# Altium PCB Mouse_SendV1.2.PcbDoc
Units mil, origin at the board's own origin, x right, y up, seen from the top; angles counter-clockwise.
Board outline 3072.9 x 2952.76 mil, 2 copper layers (Top Layer, Bottom Layer); 86 components, 63 nets, 345 pads, 275 vias.
Unrouted connection lines stored in the file: 269.
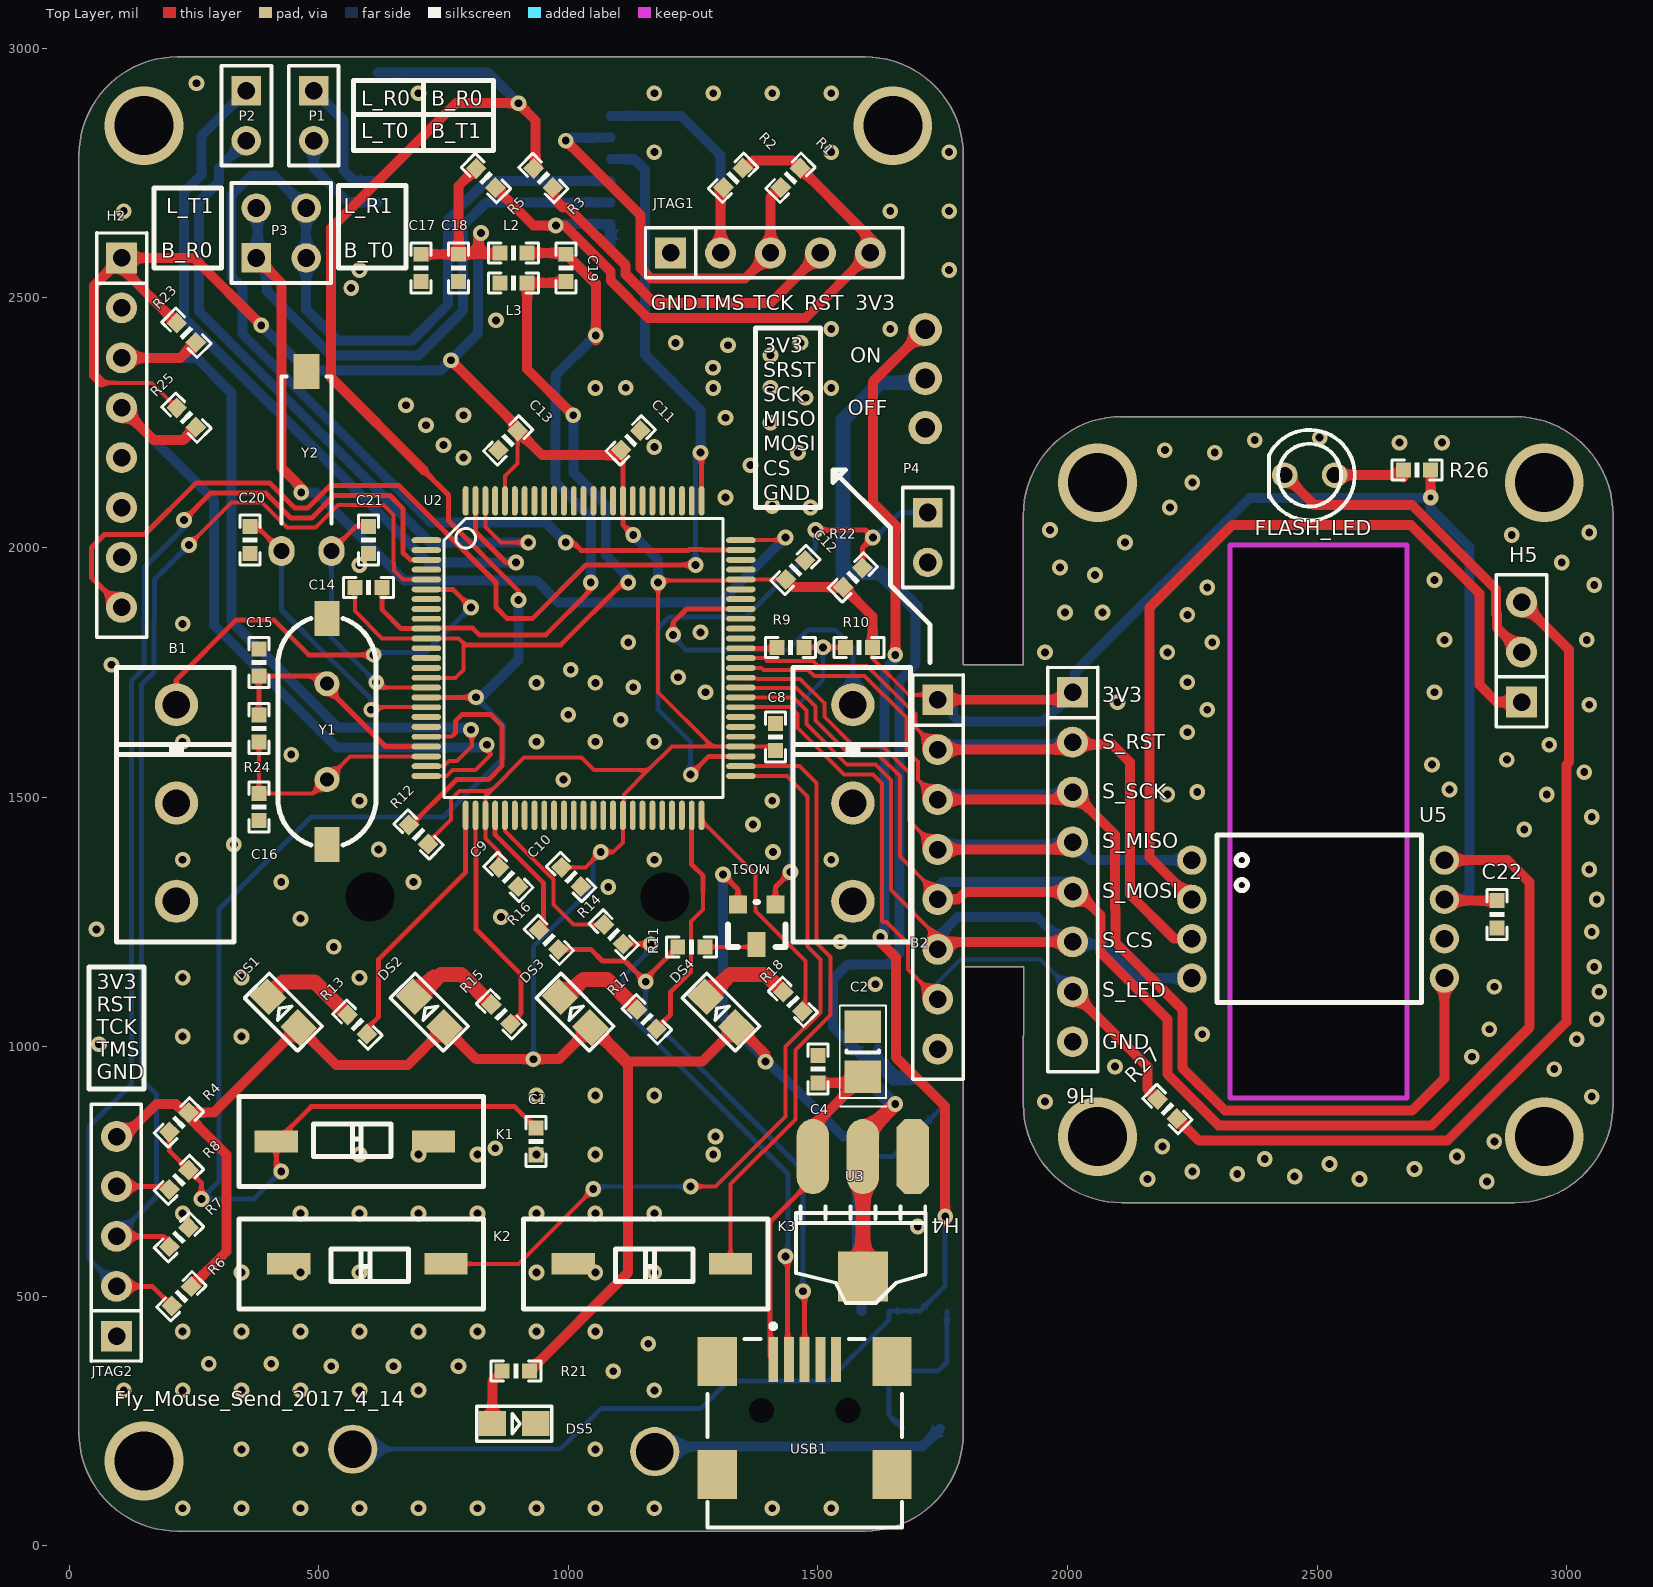
[diagram p0: Top Layer view]
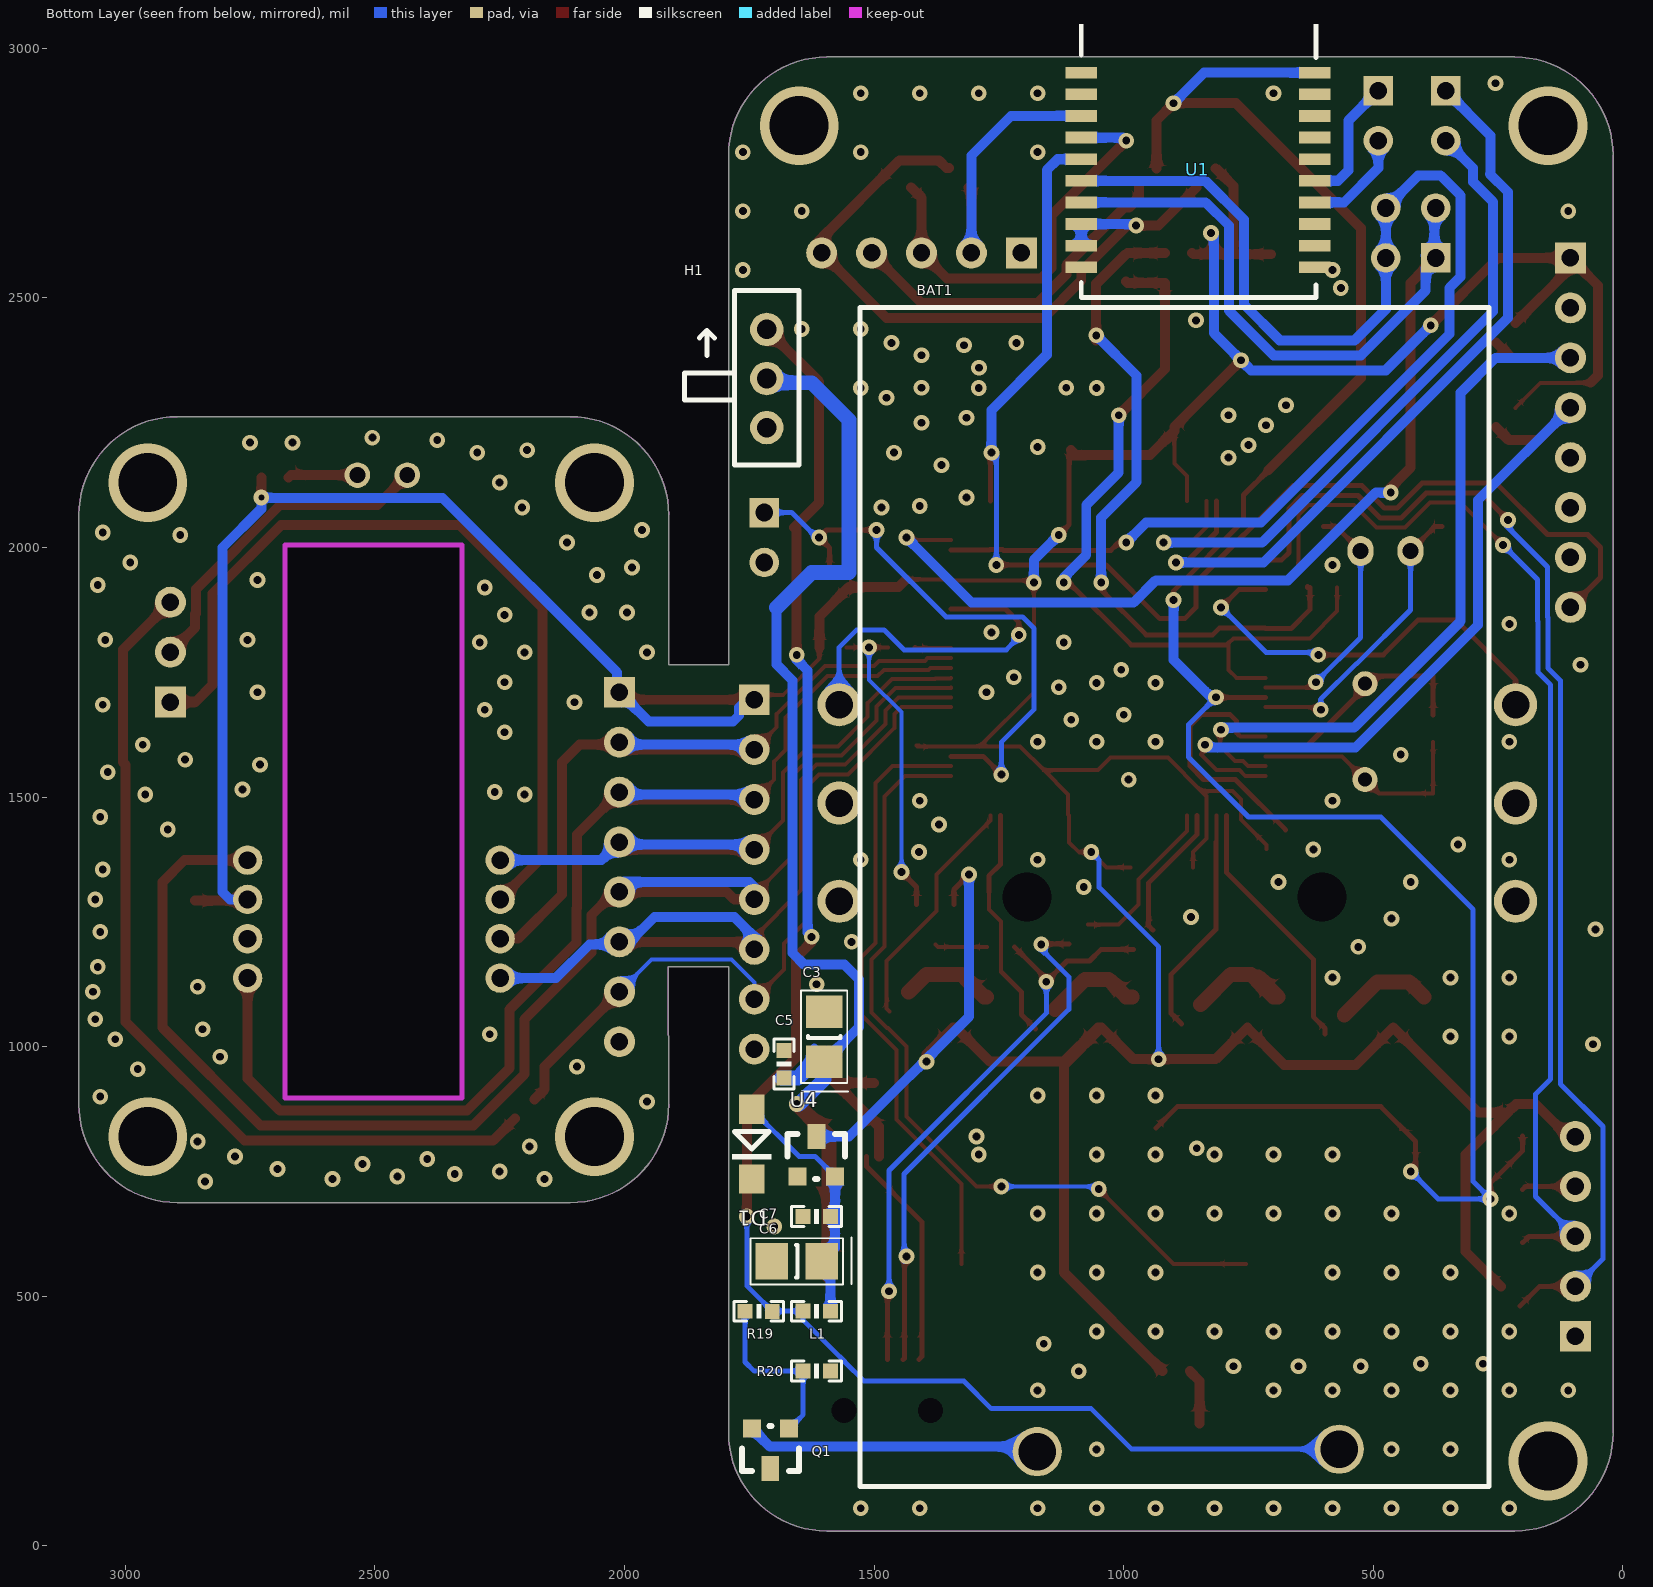
[diagram p1: Bottom Layer view, seen from below]

## Layer stack, top to bottom
Top Solder: solder mask 0.4, Solder Resist, Dk 3.5
Top Layer: signal copper 1.4
Dielectric1: dielectric 12.6, FR-4, Dk 4.8
Bottom Layer: signal copper 1.4
Bottom Solder: solder mask 0.4, Solder Resist, Dk 3.5

## Board outline
216.65,29.8 1594.61,29.8 ccw(c1594.61,226.65) 1791.46,226.65 1791.46,1160 1912.54,1160 1911.6,884.25 ccw(c2108.45,884.25) 2108.45,687.4 2895.85,687.4 ccw(c2895.85,884.25) 3092.7,884.25 3092.7,2065.35 ccw(c2895.85,2065.35) 2895.85,2262.2 2108.45,2262.2 ccw(c2108.45,2065.35) 1911.6,2065.35 1911.6,1765 1791,1765 1791,2065.35 1791.46,2065.35 1791.46,2785.71 ccw(c1594.61,2785.71) 1594.61,2982.56 216.65,2982.56 ccw(c216.65,2785.71) 19.8,2785.71 19.8,226.65 ccw(c216.65,226.65)
cut-out: 2680,2005 2680,897.01 2325.67,897.01 2325.67,2005

## Design rules (kind name [scope] priority, off if disabled: settings)
Clearance Clearance_1 [All] p1: gap=10
Clearance [All] p2: gap=10
MinimumSolderMaskSliver MinimumSolderMaskSliver_USB [HasFootprint('USB/SM0.8-6H5')] p1: minsoldermaskwidth=2
MinimumSolderMaskSliver MinimumSolderMaskSliver_TQFP100 [HasFootprint('TQFP-100') vs InPadClass('All Pads')] p2: minsoldermaskwidth=5
MinimumSolderMaskSliver [All] p3: minsoldermaskwidth=5
PolygonConnect [All] p1: connectstyle=Direct reliefconductorwidth=10 reliefentries=4 polygonreliefangle="90 Angle" airgapwidth=10
RoutingVias [All] p1: holewidth=28 width=50 viastyle="Through Hole" minholewidth=28 minwidth=50 maxholewidth=28 maxwidth=50
SilkToSilkClearance [All] p1: silktosilkclearance=0
SilkToSolderMaskClearance SilkToSolderMaskClearance_1 [IsPad] p1: minsilkscreentomaskgap=0 clearancetoexposedcopper=TRUE
SilkToSolderMaskClearance [IsPad] p2: minsilkscreentomaskgap=10 clearancetoexposedcopper=TRUE
SolderMaskExpansion [All] p1: expansion=4
Width [All] p1: maxlimit=1000 minlimit=8 preferedwidth=20
27 further rules are at their usual default settings.

## Classes and differential pairs
component class Mouse_Send_SCH: B1 B2 BAT1 C1 C2 C3 C4 C5 C6 C7 C8 C9 C10 C11 C12 C13 C14 C15 C16 C17 C18 C19 C20 C21 D1 DS1 DS2 DS3 DS4 DS5 H1 H2 H4 JTAG1 JTAG2 K1 K2 K3 L1 L2 L3 MOS1 P1 P2 P3 P4 Q1 R1 R2 R3 R4 R5 R6 R7 R8 R9 R10 R11 R12 R13 R14 R15 R16 R17 R18 R19 R20 R21 R22 R23 R24 R25 U1 U2 U3 U4 USB1 Y1 Y2
component class Optical_SCH: C22 FLASH_LED H5 H6 R26 R27 U5

## Components (designator, comment, footprint, x,y, rotation, side; value= is the part's Value field where it differs from the comment)
B1 "Button_Mouse_3" BUTTON_MOUSE_3 215,1685 r270 top
B2 "Button_Mouse_3" BUTTON_MOUSE_3 1570,1685 r270 top
BAT1 "BATT" BAT_NUM5_2 268.18,118.9 r0 bottom locked
C1 "104" 0603P 935,810 r90 top
C2 "10uF" TAJ_A 1590,990 r90 top
C3 "10uF" TAJ_A 1600,1019.8 r90 bottom
C4 "104" 0603P 1500,955 r270 top
C5 "104" 0603P 1680,965 r270 bottom
C6 "47uF" TAJ_A 1655,570 r0 bottom
C7 "104" 0603P 1615,660 r180 bottom
C8 "104" 0603P 1415,1620 r90 top
C9 "104" 0603P 880,1340 r315 top
C10 "104" 0603P 1005.6,1340 r315 top
C11 "104" 0603P 1125,2214.49 r45 top
C12 "104" 0603P 1455,1955 r45 top
C13 "104" 0603P 879.49,2214.4 r225 top
C14 "104" 0603P 600,1919.38 r180 top
C15 "22" 0603P 380,1770 r270 top
C16 "22" 0603P 380,1480 r90 top
C17 "104" 0603P 705,2559.94 r90 top
C18 "104" 0603P 780,2559.94 r90 top
C19 "104" 0603P 995,2559.94 r90 top
C20 "22" 0603P 362.31,2015 r90 top
C21 "22" 0603P 600,2015 r90 top
C22 "104" 0603P 2860,1265 r90 top
D1 "1N5817" DIODE_SOP 1745,875 r270 bottom
DS1 "" SMDLED 459.98,1038.41 r135 top
DS2 "" SMDLED 752.15,1038.41 r135 top
DS3 "" SMDLED 1044.33,1038.41 r135 top
DS4 "" SMDLED 1336.5,1038.41 r135 top
DS5 "POWER" SMDLED 847.96,245.06 r0 top
FLASH_LED "LED1" LED_A2 2485,2145 r0 top (schematic designator FLASH)
H1 "" KEY_B 1715,2240 r90 bottom
H2 "Header 8" "HEADER 8" 105,2230 r270 top
H4 "Header 8" "Header 8" 1740,1345 r270 top
H5 "Header 3" head3 2910,1690 r90 top
H6 "Header 8" "Header 8" 2010,1360 r270 top
JTAG1 "SWD" HEAD5 1405,2590 r0 top
JTAG2 "SWD" HEAD5 95,620 r90 top
K1 "KEY3" KEY2 415,810 r0 top
K2 "KEY3" KEY2 755,565 r180 top
K3 "KEY3" KEY2 1324.96,565 r180 top
L1 "221" 0603P 1615,470.13 r180 bottom
L2 "221" 0603P 890,2590 r0 top
L3 "221" 0603P 890,2530 r0 top
MOS1 "SI2301" SOT-23 1415,1285 r180 top
P1 "" HDR1X2 490,2915 r270 top
P2 "" HDR1X2 355,2915 r270 top
P3 "USART1" HDR2X2 375,2580 r0 top
P4 "Header 2" HDR1X2 1720,2070 r270 top
Q1 "MOSFET-N" MOSFET_SOT23 1670,235 r0 bottom
R1 "10K" 0603P 1445,2740.6 r45 top
R2 "10K" 0603P 1330,2740.6 r45 top
R3 "33" 0603P 950,2740 r135 top
R4 "10K" 0603P 220,848.34 r45 top
R5 "0" 0603P 835,2740 r135 top
R6 "10K" 0603P 225,500 r45 top
R7 "10K" 0603P 220,618.33 r45 top
R8 "33" 0603P 220,733.34 r45 top
R9 "1K" 0603P 1445,1800.06 r0 top
R10 "10K" 0603P 1582.5,1799.94 r180 top
R11 "1.5K" 0603P 1246.7,1200 r180 top
R12 "1.5K" 0603P 700,1425 r135 top
R13 "510" 0603P 577.55,1044.09 r135 top
R14 "33" 0603P 1090.91,1224.9 r135 top
R15 "510" 0603P 865.25,1065 r135 top
R16 "33" 0603P 960.91,1214.09 r135 top
R17 "510" 0603P 1157.42,1055 r135 top
R18 "510" 0603P 1450,1090 r135 top
R19 "1K" 0603P 1731.01,470 r0 bottom
R20 "100K" 0603P 1615,350 r180 bottom
R21 "1K" 0603P 895,350 r180 top
R22 "10K" 0603P 1570.1,1940 r225 top
R23 "4.7K" 0603P 235,2430 r135 top
R24 "1M" 0603P 380.13,1637.5 r270 top
R25 "4.7K" 0603P 235,2260 r135 top
R26 "100" 0603P 2700,2155 r0 top
R27 "100" 0603P 2200,875 r135 top
U1 "ZLG9021P0-1" ZLG9021P0-1 860,2826.11 r180 bottom locked
U2 "LPC1765" TQFP-100 716.07,2014.25 r0 top locked
U3 "1117" AMS1117 1690.03,779.94 r180 top
U4 "HT7733_SOT23" SOT-23 1653,740 r180 bottom
U5 "ADNS_5030" ADNS_5030 2249.09,1373.74 r0 top
USB1 "USB-B(Mini)" USB/SM0.8-6H5 1473.39,64.16 r270 top
Y1 "12MHz" XTAL_US 516.5,1535 r90 top
Y2 "32.768KHz" CRY-32 525,1993.32 r90 top

## Footprints (in the part's own frame and the unit in brackets; to place one, negate y for a bottom-side part, rotate by r counter-clockwise, add the part's x,y. Pads: shape width x height; smd on the part's side, far side on the other; paste and mask are expansions set on the pad)
0603P [mil]
  rect 30x30 smd: 1(-27,0) 2(27.5,-0.06)
  silkscreen extent -50,-20 50,20
ADNS_5030 [mm]
  round 1.5 hole 0.9: 1(0,0) 2(0,-2) 3(0,-4) 4(0,-6) 5(12.85,-6) 6(12.85,-4) 7(12.85,-2) 8(12.85,0)
  silkscreen extent 1.27,-7.24 11.68,1.27
AMS1117 [mil]
  oct 65x150 smd: 1(0.03,-0.06)
  oval 65x150 smd: 2(100.03,-0.06) 3(200.03,-0.06)
  rect 100x100 smd: 4(100.03,239.94)
  silkscreen extent -26,100 234,293
BAT_NUM5_2 [mm]
  round 2.5 hole 1.9: 1(7.62,-1.905) 2(22.987,-1.778)
  round 0 hole 2.5: ""(8.5,-30) ""(23.5,-30)
  silkscreen extent 0,-60 32,0
BUTTON_MOUSE_3 [mm]
  round 2.2 hole 1.4: 1(0,0) 2(5,0) 3(10,0)
  silkscreen extent -1.91,-3.05 12.06,2.92
CRY-32 [mil]
  rect 70x52 smd: 0(359.61,49.61)
  oval 60x52 hole 32: 1(-0.4,-0.39) 2(-0.4,99.61)
  silkscreen extent 55,0 350,100
DIODE_SOP [mm]
  rect 1.5x1.3 smd: 1(0,0) 2(3.556,0)
  silkscreen extent 1.14,-1.02 2.56,1.02
HDR1X2 [mm]
  rect 1.5x1.5 hole 0.9: 1(0,0)
  round 1.5 hole 0.9: 2(2.54,0)
  silkscreen extent -1.27,-1.27 3.81,1.27
HDR2X2 [mm]
  rect 1.5x1.5 hole 0.9: 1(0,0)
  round 1.5 hole 0.9: 2(0,2.54) 3(2.54,0) 4(2.54,2.54)
  silkscreen extent -1.27,-1.27 3.81,3.81
head3 [mil]
  rect 62x62 hole 35: 1(0.43,0.42)
  round 62 hole 35: 2(100.43,0.42) 3(200.43,0.42)
  silkscreen extent -50,-50 255,51
HEAD5 [mil]
  rect 62x62 hole 35: 1(-200,0)
  round 62 hole 35: 2(-100,0) 3(0,0) 4(100,0) 5(200,0)
  silkscreen extent -250,-50 265,51
"HEADER 8" [mil]
  rect 62x62 hole 35: 1(-350,0)
  round 62 hole 35: 2(-250,0) 3(-150,0) 4(-50,0) 5(50,0) 6(150,0) 7(250,0) 8(350,0)
  silkscreen extent -400,-50 410,51
"Header 8" [mil]
  rect 62x62 hole 35: 1(-350,0)
  round 62 hole 35: 2(-250,0) 3(-150,0) 4(-50,0) 5(50,0) 6(150,0) 7(250,0) 8(350,0)
  silkscreen extent -400,-50 410,51
KEY2 [mm]
  rect 2.2x1.1 smd: 1(0,0) 2(8,0)
  silkscreen extent -1.91,-2.29 10.54,2.29
KEY_B [mm]
  round 1.7 hole 1: 1(0,0) 2(2.5,0) 3(5,0)
  silkscreen extent -1.91,-1.65 6.98,4.19
LED_A2 [mm] "直径3MM二极管"
  round 1.3 hole 0.8: 1(1.27,0) 2(-1.27,0)
  silkscreen extent -2.06,-2.3 2.3,2.3
MOSFET_SOT23 [mil]
  rect 36x50 smd: 1(38,80)
  rect 36x36 smd: 2(0,0) 3(75,0)
  silkscreen extent -20,-5 95,85
SMDLED [mm]
  rect 1.4x1.27 smd: 1(0.001,-0.002) 2(2.211,-0.002)
  silkscreen extent -0.8,-0.89 3.01,0.89
SOT-23 [mil]
  rect 36x36 smd: 1(0,0) 2(75,0)
  rect 36x50 smd: 3(38,80)
  silkscreen extent -20,-5 95,85
TAJ_A [mm] "Chip Capacitor, 2-Leads, Body 3.2x1.7mm, IPC Medium Density"
  rect 1.65x1.85 smd: 1(-1.275,0) 2(1.275,0)
  silkscreen extent -2.79,-1.21 2.35,1.17, body extent -1.7,-0.9 1.7,0.9, height 1.8
TQFP-100 [mm]
  oval 1.5x0.3 smd: 1(-0.01,0.01) 2(-0.01,-0.49) 3(-0.01,-0.99) 4(-0.01,-1.49) 5(-0.01,-1.99) 6(-0.01,-2.49) 7(-0.01,-2.99) 8(-0.01,-3.49) 9(-0.01,-3.99) 10(-0.01,-4.49) 11(-0.01,-4.99) 12(-0.01,-5.49) 13(-0.01,-5.99) 14(-0.01,-6.49) 15(-0.01,-6.99) 16(-0.01,-7.49) 17(-0.01,-7.99) 18(-0.01,-8.49) 19(-0.01,-8.99) 20(-0.01,-9.49) 21(-0.01,-9.99) 22(-0.01,-10.49) 23(-0.01,-10.99) 24(-0.01,-11.49) 25(-0.01,-11.99) 51(15.99,-11.99) 52(15.99,-11.49) 53(15.99,-10.99) 54(15.99,-10.49) 55(15.99,-9.99) 56(15.99,-9.49) 57(15.99,-8.99) 58(15.99,-8.49) 59(15.99,-7.99) 60(15.99,-7.49) 61(15.99,-6.99) 62(15.99,-6.49) 63(15.99,-5.99) 64(15.99,-5.49) 65(15.99,-4.99) 66(15.99,-4.49) 67(15.99,-3.99) 68(15.99,-3.49) 69(15.99,-2.99) 70(15.99,-2.49) 71(15.99,-1.99) 72(15.99,-1.49) 73(15.99,-0.99) 74(15.99,-0.49) 75(15.99,0.01)
  oval 0.3x1.5 smd: 26(1.99,-13.99) 27(2.49,-13.99) 28(2.99,-13.99) 29(3.49,-13.99) 30(3.99,-13.99) 31(4.49,-13.99) 32(4.99,-13.99) 33(5.49,-13.99) 34(5.99,-13.99) 35(6.49,-13.99) 36(6.99,-13.99) 37(7.49,-13.99) 38(7.99,-13.99) 39(8.49,-13.99) 40(8.99,-13.99) 41(9.49,-13.99) 42(9.99,-13.99) 43(10.49,-13.99) 44(10.99,-13.99) 45(11.49,-13.99) 46(11.99,-13.99) 47(12.49,-13.99) 48(12.99,-13.99) 49(13.49,-13.99) 50(13.99,-13.99) 76(13.99,2.01) 77(13.49,2.01) 78(12.99,2.01) 79(12.49,2.01) 80(11.99,2.01) 81(11.49,2.01) 82(10.99,2.01) 83(10.49,2.01) 84(9.99,2.01) 85(9.49,2.01) 86(8.99,2.01) 87(8.49,2.01) 88(7.99,2.01) 89(7.49,2.01) 90(6.99,2.01) 91(6.49,2.01) 92(5.99,2.01) 93(5.49,2.01) 94(4.99,2.01) 95(4.49,2.01) 96(3.99,2.01) 97(3.49,2.01) 98(2.99,2.01) 99(2.49,2.01) 100(1.99,2.01)
  silkscreen extent 0.89,-13.09 15.09,1.11
USB/SM0.8-6H5 [mm]
  rect 2.3x0.5 smd: 1(-7.85,-1.6) 2(-7.85,-0.8) 3(-7.85,0) 4(-7.85,0.8) 5(-7.85,1.6)
  rect 2.5x2 smd: 6(-7.75,4.45) 7(-1.996,4.45) 8(-7.75,-4.45) 9(-1.996,-4.45)
  round 0.6 hole 1.27 unplated: MH1(-5.25,2.2) MH2(-5.25,-2.2)
  silkscreen extent -9.67,-4.95 0.7,4.95
XTAL_US [mil]
  round 50 hole 28: 1(0,0) 2(192.13,0)
  rect 70x50 smd: ""(-130.32,0) ""(322.44,0)
  silkscreen extent -131,-98 323,98
ZLG9021P0-1 [mm]
  rect 1.6x0.6 smd: 1(-5.715,3.175) 2(-5.715,2.075) 3(-5.715,0.975) 4(-5.715,-0.125) 5(-5.715,-1.225) 6(-5.715,-2.325) 7(-5.715,-3.425) 8(-5.715,-4.525) 9(-5.715,-5.625) 10(-5.715,-6.725) 10(-5.715,-6.725) 11(6.165,-6.725) 11(6.165,-6.725) 12(6.165,-5.625) 13(6.165,-4.525) 14(6.165,-3.425) 15(6.165,-2.325) 16(6.165,-1.225) 17(6.165,-0.125) 18(6.165,0.975) 19(6.165,2.075) 20(6.165,3.175)
  silkscreen extent -5.72,-8.26 6.22,9.5

## Part data
BAT1: library part BAT
C1 C4 C5 C7 C8 C9 C10 C11 C12 C13 C14 C15 C16 C17 C18 C19 C20 C21 C22: library part C
C2 C3 C6: library part CAP
D1: library part D
DS1 DS2 DS3 DS4 DS5 FLASH_LED: library part LED2, "Typical RED, GREEN, YELLOW, AMBER GaAs LED"
H1: library part "Header 3"
L1 L2 L3: library part Inductor
MOS1: library part MOS-P, "IRLML6401/SI2301"
P1 P2: library part "Header 2"
P3: library part "Header 2X2", "Header, 2-Pin, Dual row"
Q1: "N-Channel MOSFET"
R1 R2 R3 R4 R5 R6 R7 R8 R9 R10 R11 R12 R13 R14 R15 R16 R17 R18 R19 R20 R21 R22 R23 R24 R25 R26 R27: library part R
USB1: library part USB5
Y1 Y2: library part CRYSTAL, "Crystal"

## Via types
v1: diameter 31.5, hole 15.75, Top Layer to Bottom Layer, tented both sides, 267 vias
v2: diameter 157.48, hole 118.11, Top Layer to Bottom Layer, 7 vias
v3: diameter 31.5, hole 11.81, Top Layer to Bottom Layer, 1 vias

## Nets (pads, with @x,y where several pads share a name; then routed paths per layer and width w, separated by ;. In a path a pad name is that pad's centre, name@x,y a point inside that pad or via, vN(x,y) a via of type N, cw(c..) or ccw(c..) an arc to the next point about the centre after c; other vN are vias at no path point)
9021_TCK: JTAG1.3 R1.1 U1.4 | length 839.9
  Top Layer w20: v1(995,2815) 1145,2665 1145,2559.72 1165.72,2539 1354,2539 JTAG1.3 1405,2700.6 R1.1
  Bottom Layer w20: v1(995,2815) 1001.19,2821.19 U1.4
9021_TMS: JTAG1.2 R2.1 U1.3 | length 581.9
  Top Layer w20: JTAG1.2 1305,2715.6 R2.1
  Bottom Layer w20: U1.3 1225.5,2864.5 1305,2785 JTAG1.2
9201_RX0: P3.1 P3.2 U1.7 U2.75 | length 2857
  Top Layer w8: U2.75 1429.66,2014.66 v1(1435,2020)
  Top Layer w20: P3.1 425,2530 425,2160 v1@470,2115
  Bottom Layer w20: P3.1@375,2602.49 P3.1@376.25,2603.74 ; P3.1@375,2604.99 P3.1@376.25,2603.74 ; P3.2@375,2672.5 P3.2@377.5,2670 ; P3.1@377.5,2582.5 P3.1@377.5,2602.49 ; P3.2@377.5,2677.5 P3.2@377.5,2670 ; P3.1@395,2560 395,2514.79 524.79,2385 699.85,2385 789.25,2474.4 789.25,2644.81 835.71,2691.27 U1.7 ; P3.1@395,2584.99 P3.1@377.5,2602.49 ; v1(465,2110) 495,2110 670.75,1934.25 935.75,1934.25 980,1890 1305,1890 v1(1435,2020) ; P3.1@376.25,2603.74 P3.1@377.5,2602.49 ; P3.1@376.25,2603.74 P3.1@377.5,2604.99 ; P3.1@377.5,2602.49 P3.1@377.5,2604.99 ; P3.1@377.5,2604.99 P3.2@377.5,2670
9201_TX0: P3.3 P3.4 U1.6 U2.74 | length 2734.9
  Top Layer w10: v1(995,2010) 1010,2010 1025.75,1994.25 1240.77,1994.25 1242.26,1995.75 1267.74,1995.75 1268.78,1994.71 1345.32,1994.71 U2.74
  Bottom Layer w20: P3.3@469.44,2604.99 P3.3@475,2604.99 ; v1(995,2010) 955,2050 725,2050 347.5,2427.5 347.5,2520.16 325.47,2542.19 325.47,2705.47 365,2745 410,2745 P3.4 P3.3@475,2604.99 ; U1.6 836.6,2734.58 759.25,2657.23 759.25,2486.83 687.43,2415 537.22,2415 475,2477.22 P3.3 P3.3@475,2604.99
A_GND: C14.2 C19.1 L3.2 U2.11 U2.15 | length 1570.9
  Top Layer w8: C14.2 572.5,1872.5 627.19,1817.81 780.46,1817.81 790,1808.27 790,1755 774.07,1739.07 U2.15
  Top Layer w10: 790,1808.27 793.27,1805 985,1805 1110,1930 v1(1120,1930)
  Top Layer w20: C19.1 992,2529.94 L3.2 917.5,2357.5 v1(1010,2265)
  Bottom Layer w20: v1(1010,2265) 1010,2150 1075,2085 1075,1985 1120,1940 v1(1120,1930)
A_VCC_3V3: C14.1 C19.2 L2.2 U2.10 | length 1372.8
  Top Layer w10: C14.1 627,1875.49 665,1837.49 U2.10 716.45,1838.27 808.44,1838.27 821.72,1825 955,1825 1045,1915 v1(1045,1930) ; C14.1@632,1919.39 C14.1@632,1922.29
  Top Layer w20: L2.2 992.56,2589.94 C19.2 995.96,2587.44 1055,2528.39 v1(1055,2425) v1@1055,2415
  Bottom Layer w20: v1(1045,1930) 1045,2060 974.25,2130.75 974.25,2344.25 v1(1055,2425)
D+: R11.2 R16.1 USB1.3 | length 1187.2
  Top Layer w10: R16.1 1045,1195 1068.4,1171.6 1113.4,1171.6 v1(1155,1130) 1155,1135.86 R11.2 ; v1(1470,510) 1473.39,506.61 USB1.3
  Bottom Layer w10: v1(1155,1130) 1155,1067.08 1470,752.08 v1(1470,510)
FLASH_LED: H4.7 H6.7 R27.2 U2.58 | length 1494.7
  Top Layer w8: U2.58 1444.99,1680.01 1458.69,1666.31 1458.69,1638.9 1552.13,1545.46 1593.74,1545.46 1594.19,1545 1610,1545 1628,1527 1628,1252 1630.25,1249.75 1637.32,1249.75 1680,1207.07 1680,1155 H4.7 H4.7@1740,1110
  Top Layer w20: H6.7 2160.05,959.95 2160.05,915.05 R27.2
  Bottom Layer w8: H4.7 1740,1128.7 1785.55,1174.25 1945.75,1174.25 H6.7
GND: B1.2 B2.2 C1.1 C2.2 C3.2 C4.1 C5.1 C6.2 C7.1 C8.2 C9.2 C10.2 C11.2 C12.2 C13.2 C15.1 C16.1 C17.1 C18.1 C20.1 C21.1 C22.1 D1.2 DS5.2 H2.2 H2.7 H4.8 H6.8 JTAG1.1 JTAG2.1 K1.2 K2.2 K3.2 L3.1 P4.2 Q1.1 R7.2 R20.2 U1.10 U1.11 U2.31 U2.41 U2.55 U2.72 U2.83 U2.97 U3.1 U4.1 U5.6 USB1.5 USB1.6 USB1.7 USB1.8 USB1.9
  other v1: 227.44,75.35 345.55,75.35 463.66,75.35 581.77,75.35 699.88,75.35 817.99,75.35 936.1,75.35 1054.21,75.35 1172.32,75.35 1408.54,75.35 1526.65,75.35 345.55,193.46 463.66,193.46 1054.21,193.46 109.33,311.57 227.44,311.57 345.55,311.57 463.66,311.57 581.77,311.57 699.88,311.57 1172.32,311.57 1090,350 525,360 650,360 780,360 280,365 405,365 1160,405 227.44,429.68 345.55,429.68 463.66,429.68 581.77,429.68 699.88,429.68 817.99,429.68 936.1,429.68 1054.21,429.68 345.55,547.8 463.66,547.8 581.77,547.8 936.1,547.8 1054.21,547.8 1172.32,547.8 1700,640 227.44,665.91 463.66,665.91 581.77,665.91 699.88,665.91 817.99,665.91 936.1,665.91 1054.21,665.91 1172.32,665.91 2840,730 2160,735 2585,735 2455,740 2340,745 2250,750 2695,755 2525,765 2395,775 2780,780 581.77,784.02 699.88,784.02 817.99,784.02 936.1,784.02 1054.21,784.02 1290.43,784.02 853.5,796.5 2190,800 2855,810 1295,820 1955,890 3050,900 936.1,902.13 1054.21,902.13 1172.32,902.13 2975,955 2095,960 2810,980 60,1005 3020,1015 227.44,1020.24 345.55,1020.24 2270,1025 2845,1035 3060,1055 3065,1110 2855,1120 1615,1125 227.44,1138.35 345.55,1138.35 581.77,1138.35 3055,1160 530,1200 1545,1210 3050,1230 55,1235 463.66,1256.46 865,1260 3060,1295 1080,1320 425,1330 690,1330 3045,1355 227.44,1374.57 1172.32,1374.57 1526.65,1374.57 1410,1390 620,1395 330,1405 2915,1435 1370,1445 3050,1460 581.77,1492.68 1408.54,1492.68 2200,1505 2960,1505 2260,1510 2765,1515 990,1535 3035,1550 2730,1565 2880,1575 445,1585 2965,1605 227.44,1610.79 936.1,1610.79 1054.21,1610.79 1172.32,1610.79 2240,1630 1105,1655 1000,1665 2280,1675 3045,1685 2100,1690 1275,1710 2735,1710 1130,1720 936.1,1728.9 1054.21,1728.9 2240,1730 1220,1740 1005,1755 85,1765 1955,1790 2200,1790 1120,1810 2290,1810 2755,1815 3040,1815 1265,1830 227.44,1847.01 2240,1865 1995,1870 2070,1870 2280,1920 3055,1925 2735,1935 2055,1945 1985,1960 581.77,1965.12 2990,1970 2115,2010 2890,2025 3045,2030 1965,2035 1485,2080 2205,2080 1408.54,2083.23 1315,2100 2250,2130 1365,2165 790,2180 1460,2190 2295,2190 2195,2195 1172.32,2201.34 750,2205 2665,2210 2750,2210 2375,2215 2505,2220 715,2245 1405,2250 1315,2260 790,2265 675,2285 1475,2300 1054.21,2319.45 1290.43,2319.45 1526.65,2319.45 1115,2320 1405,2320 1290,2360 1405,2385 1320,2405 1215,2410 1465,2410 1526.65,2437.56 1644.76,2437.56 855,2455 565,2520 581.77,2555.67 1762.87,2555.67 109.33,2673.78 1644.76,2673.78 1762.87,2673.78 1172.32,2791.89 1526.65,2791.89 1762.87,2791.89 699.88,2910 1172.32,2910 1290.43,2910 1408.54,2910 1526.65,2910 255,2930
  other v2: 150,170 2060,820 2955,820 2060,2130 2955,2130 150,2845 1650,2845
ISP: P4.1 R22.1 U2.53 | length 1195
  Top Layer w10: v1(1245,1545) 1281.59,1581.59 U2.53 ; v1(1495,2035) 1595,2035 v1(1610,2020) 1589.19,1999.19 R22.1 ; P4.1@1700.1,2070 P4.1
  Bottom Layer w10: v1(1245,1545) 1245,1610 1179.25,1675.75 1179.25,1837.74 1202.26,1860.75 1355.75,1860.75 1495,2000 v1(1495,2035) ; v1(1610,2020) 1615,2020 1665,2070 P4.1
KEY0: B1.1 U2.6 | length 865.4
  Top Layer w10: B1.1@215,1681.99 B1.1 215,1735 335,1855 410,1855 480,1785 v1(610,1785) ; U2.6 768.77,1916.23 v1(805,1880)
  Bottom Layer w10: v1(610,1785) 615,1790 715,1790 v1(805,1880)
KEY1: B2.1 U2.68 | length 693.6
  Top Layer w10: v1(1210,1825) 1210,1850 1236.86,1876.86 U2.68 U2.68@1345.9,1877.18
  Bottom Layer w10: v1(1210,1825) 1210,1820 1235,1795 1440,1795 1480,1835 1535,1835 1570,1800 B2.1
KEY2: K3.1 U2.52 | length 1222.9
  Top Layer w8: K3.1 1324.96,724.5 1455,854.54 1455,993.18 1525,1063.18 1525,1180 1496.91,1208.09 1496.91,1528.09 1463.1,1561.9 U2.52
KEY3: K2.1 U2.51 | length 1634.5
  Top Layer w8: K2.1 900,565 v1(1050,715) ; v1(1245,720) 1295,720 1435,860 1435,1000.46 1472.24,1037.69 1474.06,1037.69 1505,1068.63 1505,1174.54 1478.91,1200.64 1478.91,1501.09 1437.78,1542.22 U2.51
  Bottom Layer w8: v1(1050,715) 1055,720 v1(1245,720)
LED0: R13.1 U2.26 | length 520.4
  Top Layer w10: R13.1 596.64,1036.64 620,1060 620,1175 794.41,1349.41 U2.26
LED1: R15.1 U2.27 | length 463.8
  Top Layer w8: U2.27 814.1,1410.91 815,1410
  Top Layer w10: 815,1410 815,1235 905,1145 905,1066.57 R15.1
LED2: R17.1 U2.49 | length 475.8
  Top Layer w8: 1245,1150 1246.2,1151.2 1246.2,1251.2 1270,1275 1270,1310
  Top Layer w10: R17.1 1205,1064.39 1205,1110 1245,1150 ; U2.49 1247.16,1365 1270,1342.16 1270,1310
LED3: R18.1 U2.50 | length 481.2
  Top Layer w8: U2.50@1266.85,1463.48 1266.85,1453.15 1375,1345 1375,1272.03 1475,1172.03 1475,1076.82 R18.1
LPC_RX0: P2.1 U2.99 | length 1544.6
  Top Layer w10: U2.99 814.1,2030.91 875,1970 v1(895,1970)
  Bottom Layer w20: P2.1 265,2825 265,2750 266.54,2748.46 230,2711.92 230,2460.15 720.15,1970 v1(895,1970)
LPC_TX0: P2.2 U2.98 | length 1384.7
  Top Layer w8: U2.98 833.78,2041.22 865,2010 v1(920,2010)
  Bottom Layer w20: P2.2 300,2760 300,2732.54 260,2692.54 260,2472.57 722.57,2010 v1(920,2010)
MPU6050_INT0: H2.8 U1.5 U2.76 | length 2648.8
  Top Layer w10: H2.8 45,1940 45,2000 70,2025 70,2026 151,2026 254,2129 402.52,2129 452.26,2079.25 477.74,2079.25 522.48,2124 661,2124 855,1930 855,1880 877.5,1857.5 927.5,1857.5 1035,1965 v1(1255,1965) ; v1(1265,2190) 1266.85,2188.15 U2.76@1266.85,2093.4
  Bottom Layer w10: v1(1255,1965) 1255,2180 v1(1265,2190)
  Bottom Layer w20: U1.5 1132.12,2777.88 1154,2756 1154,2386 1265,2275 v1(1265,2190)
NetBAT1_1: BAT1.1 H1.3 L1.1 R19.1 | length 3391.9
  Top Layer w20: v1(1625,1220) 1625,1210 1656,1179 1656,979 1755,880 v1(1755,660) v1@1755,650 ; v1(1655,1785) 1655,2035 1660,2040 1610,2090 1610,2331.85 H1.3
  Bottom Layer w10: BAT1.1 983.9,193.9 1065,275 1265,275 1320,330 1520,330 1559.5,369.5 1559.5,370.32 1567.12,377.94 1567.94,377.94 1642,452 L1.1 1703.88,470.13 R19.1 1755,520.99 v1(1755,660)
  Bottom Layer w20: v1(1625,1220) 1633.31,1228.31 1633.31,1753.31 1655,1775 v1(1655,1785)
NetBAT1_2: BAT1.2 Q1.3 | length 590.9
  Bottom Layer w20: BAT1.2 1183.28,199 1709,199 Q1.3
NetC2_1: C2.1 C4.2 U3.3 USB1.1 | length 745.1
  Top Layer w10: USB1.1 1404.25,379.37 1404.25,649.25 1515,760 U3.3@1515,780 ; C2.1 C2.1@1597.7,947.5
  Top Layer w20: U3.3 1490,839.8 C2.1@1577.7,927.5 ; C4.2 C2.1@1577.7,927.5 ; C2.1 C2.1@1577.7,927.5
NetC3_1: C3.1 C5.2 H1.2 U3.2 U3.4 | length 2324.4
  Top Layer w30: U3.4 U3.2 1590,820 v1(1655,885)
  Bottom Layer w15: C3.1@1620,969.61 C3.1@1620,999.18
  Bottom Layer w20: C3.1 1530,1039.61 1530,1135 1559.25,1164.25 1640,1164.25 1663.31,1187.56 1663.31,1733.59 1695.75,1766.03 1695.75,1879.25 1695,1880
  Bottom Layer w30: C3.1 1600,935 1650,885 v1(1655,885) ; C3.1@1620,969.61 1652.11,937.5 C5.2 C5.2@1685.06,937.5 ; 1695,1880 1625,1950 1550,1950 1550,2255 1625,2330 1706.57,2330 H1.2
NetC6_1: C6.1 C7.2 D1.1 L1.2 U4.2 | length 511.1
  Bottom Layer w10: U4.2 1618,780 1650,780 D1.1
  Bottom Layer w20: U4.2 1578,596.8 C6.1 1604.8,549.8 1587.5,532.5 L1.2
NetDS1_2: DS1.2 R13.2 | length 199.6
  Top Layer w30: DS1.2 428.48,1130 491.73,1130 R13.2
NetDS2_2: DS2.2 R15.2 | length 255.5
  Top Layer w30: 730.65,1140 DS2.2 700,1100 745,1145 785.34,1145 R15.2
NetDS3_2: DS3.2 R17.2 | length 194.8
  Top Layer w30: DS3.2 995,1100 1030,1135 1077.51,1135 R17.2
NetDS4_2: DS4.2 R18.2 | length 188.9
  Top Layer w30: DS4.2 1280,1100 1325,1145 1395.09,1145 R18.2
NetDS5_1: DS5.1 R21.2 | length 113.1
  Top Layer w20: DS5.1 847.99,330.56 R21.2
NetFLASH_1: FLASH_LED.1 R26.1 | length 140.1
  Top Layer w20: FLASH_LED.1 2668,2145 R26.1@2673,2140
NetFLASH_2: FLASH_LED.2 H5.2 | length 665.4
  Top Layer w20: FLASH_LED.2 2495,2085 2690,2085 2858.58,1916.43 2858.58,1867.88 2860,1866.45 2860,1840 H5.2
NetH5_1: H5.1 U5.2 | length 1687.2
  Top Layer w20: U5.2 2164.25,1379.84 2164.25,1879.25 2330,2045 2687.57,2045 2825,1907.57 2825,1725 2859.58,1690.43 H5.1
NetH5_3: H5.3 R27.1 | length 1778.7
  Top Layer w20: R27.1 2262.99,812.01 2761.45,812.01 2999.25,1049.81 2999.25,1564.81 3004.25,1569.81 3004.25,1795.75 H5.3
NetJTAG1_4: JTAG1.4 R3.1 | length 695.3
  Top Layer w20: R3.1 969.09,2700.91 989.25,2680.75 999.63,2680.75 1115,2565.38 1115,2547.29 1172.29,2490 1405,2490 JTAG1.4
NetMOS1_1: MOS1.1 R9.2 R10.2 | length 636.8
  Top Layer w8: R9.2 v1(1510,1800) R10.2
  Top Layer w10: MOS1.1 1415,1320 v1(1445,1350)
  Bottom Layer w8: v1(1445,1350) 1445,1670 1510,1735 v1(1510,1800)
NetMOS1_3: MOS1.3 R11.1 | length 105.4
  Top Layer w8: R11.1 1372,1200 MOS1.3
NetQ1_2: Q1.2 R19.2 R20.1 | length 352.3
  Bottom Layer w10: Q1.2 1642,263 R20.1 1647,350 1740,350 1758.51,368.51 R19.2
NetR12_2: R12.2 U2.21 | length 518.7
  Top Layer w8: U2.21 765.96,1620.96 769.63,1624.63
  Top Layer w10: R12.2@675.6,1434.49 776.11,1535 840,1535 867.5,1562.5 867.5,1642.5 844.25,1665.75 787.26,1665.75 774.25,1652.74 774.25,1629.25 769.63,1624.63
NetR14_1: R14.1 USB1.2 | length 1059.4
  Top Layer w10: R14.1 1164.19,1205.81 v1(1165,1205) ; v1(1435,580) 1439.25,575.75 1439.25,375.86 USB1.2
  Bottom Layer w10: v1(1165,1205) 1165,1195 1110,1140 1110,1075 1440,745 v1@1440,570
OSC_32K_IN: C21.2 U2.16 Y2.1 | length 500.3
  Top Layer w8: v1(615,1730) 625.62,1719.38 U2.16
  Top Layer w10: Y2.1 574.96,2042.5 C21.2
  Bottom Layer w10: Y2.1 525.39,1819.61 v1(615,1730)
OSC_32K_OUT: C20.2 U2.18 Y2.2 | length 589.5
  Top Layer w8: v1(605,1675) 610.01,1680.01 U2.18
  Top Layer w10: C20.2 375.81,2042.5 Y2.2
  Bottom Layer w10: Y2.2 425.39,1874.61 532.87,1767.13 534.39,1767.13 605,1696.52 v1(605,1675)
OSC_IN: C15.2 R24.1 U2.22 Y1.2 | length 477.4
  Top Layer w10: R24.1 379.94,1664.69 C15.2 501.13,1742.5 Y1.2 516.5,1718.5 633.73,1601.27 U2.22
OSC_OUT: C16.2 R24.2 U2.23 Y1.1 | length 468.8
  Top Layer w8: R24.2 C16.2 489,1507.5 Y1.1 563.09,1581.59 U2.23
P2_9: R9.1 U2.64 | length 73.2
  Top Layer w10: U2.64 1416.06,1798.12 R9.1
RESET: C1.2 K1.1 R3.2 R4.1 R8.2 U1.20 U2.17 | length 4563
  Top Layer w10: R4.1@200.91,820.91 200.91,791.32 265,727.23 v1@265,705 ; v1(425,750) 415,760 K1.1 485,880 892.56,880 C1.2 ; 710,2155 760,2105 760,2053.28 900,1913.28 v1(900,1895) ; U2.17 814.7,1699.7 v1(815,1700) v1@819.25,1695.75
  Top Layer w20: 710,2155 525,2340 525,2640 775,2890 v1(900,2890) 934.49,2855.51 R3.2@934.49,2759.4
  Bottom Layer w10: v1(425,750) 370,695 v1(265,695) 300,730 300,1275 485,1460 750,1460 870,1580 870,1645 v1(815,1700)
  Bottom Layer w20: U1.20 838.89,2951.11 v1(900,2890) ; v1(815,1700) 825,1700 900,1775 v1(900,1895)
RX1: P1.1 U1.15 | length 260.6
  Bottom Layer w20: P1.1 550,2855 550,2755 570.42,2734.58 U1.15
SCL0: H2.3 R23.1 U2.24 | length 1586.4
  Top Layer w8: U2.24 750.69,1561.9 760.78,1572 777,1572 807,1602 807,1637 v1(805,1635)
  Top Layer w20: H2.3 223.18,2380 R23.1
  Bottom Layer w20: H2.3 255,2380 325,2310 325,1852.43 538.17,1639.25 804.25,1639.25 805,1638.5 v1(805,1635)
SDA0: H2.4 R25.1 U2.25 | length 1519.8
  Top Layer w8: U2.25 756.46,1542.22 768.24,1554 814,1554 845,1585 836.75,1593.25 v1(836.75,1605)
  Top Layer w20: H2.4 170,2215 228.18,2215 R25.1
  Bottom Layer w20: H2.4 290,2095 290,1845 535.75,1599.25 831,1599.25 v1(836.75,1605)
SPI0_CS: H4.6 H6.6 U2.59 U5.4 | length 1613
  Top Layer w8: U2.59 1450.76,1699.7 1476.69,1673.76 1476.69,1646.35 1557.76,1565.28 1615.17,1565.28 1646,1534.46 1646,1314 1740,1220 H4.6@1740,1205
  Top Layer w20: H4.6 1755,1210 H6.6
  Bottom Layer w20: H4.6@1735,1215 1780,1260 1940,1260 1995,1205 2070,1205 2137.48,1137.52 U5.4
SPI0_MISO: H4.4 H6.4 U2.61 U5.1 | length 1412.7
  Top Layer w8: U2.61 1347.27,1737.38 1377.43,1737.38 1377.81,1737 1464.37,1737 1512.69,1688.67 1512.69,1661.26 1572.67,1601.28 1630.09,1601.28 1682,1549.37 1682,1453 H4.4
  Top Layer w20: H4.4 1995,1395 H6.4
  Bottom Layer w20: H4.4@1735,1405 2015,1405 2046.26,1373.74 U5.1
SPI0_MOSI: H4.5 H6.5 U2.60 U5.8 | length 3025.7
  Top Layer w8: U2.60 1345.97,1719 1456.91,1719 1494.69,1681.22 1494.69,1653.81 1565.22,1583.28 1622.63,1583.28 1664,1541.91 1664,1381 H4.5@1730,1315 ; H4.5@1735,1315 H4.5@1730,1315 ; H4.5@1740,1305 H4.5@1730,1315
  Top Layer w20: H4.5 1780,1295 1795,1310 H6.5 ; H6.5@2015,1305 2025,1305 2066,1264 2066,1189 2200,1055 2200,944.9 2302.89,842.01 2729.03,842.01 2925,1037.98 2925,1330 2881.26,1373.74 U5.8
  Bottom Layer w20: H4.5@1735,1315 1750,1330 1990,1330 H6.5@2015,1305
SPI0_RST: H4.2 H6.2 U2.63 U5.3 | length 1592.5
  Top Layer w8: U2.63 1392.66,1778.44 1398.03,1773.06 1427.39,1773.06 1427.46,1773 1489.75,1773 1500,1762.75 1598.75,1762.75 1695,1666.5 1695,1640 H4.2
  Top Layer w20: H4.2 1995,1595 H6.2 ; H6.2@2015,1605 2090,1605 2125,1570 2125,1305 2213.74,1216.26 U5.3
  Bottom Layer w20: H4.2@1735,1605 H6.2@2015,1605
SPI0_SCK: H4.3 H6.3 U2.62 U5.5 | length 2543.8
  Top Layer w8: U2.62 1386.89,1758.75 1390.57,1755.06 1419.94,1755.06 1420,1755 1480,1755 1492.69,1742.31 1593.74,1742.31 1677,1659.04 1677,1594.36 1700,1571.36 1700,1535 H4.3
  Top Layer w20: H4.3 1995,1495 H6.3 ; H6.3@2015,1505 2095,1425 2095,1277.43 2096,1276.43 2096,1209 2230,1075 2230,957.32 2315.31,872.01 2690.36,872.01 2755,936.65 U5.5
  Bottom Layer w20: H4.3@1735,1505 H6.3@2015,1505
TCK: JTAG2.3 R7.1 U2.5 | length 2257.2
  Top Layer w8: v1(240,2005) 325,2090 386.36,2090 436.11,2040.25 493.89,2040.25 538.64,2085 630,2085 650,2065 650,1970 651,1969 651,1954 669.08,1935.92 U2.5
  Top Layer w10: JTAG2.3 188.49,620 R7.1@200.91,607.58
  Bottom Layer w10: JTAG2.3 175,700 175,905 145,935 145,1725 170,1750 170,1851.66 171,1852.66 171,1936 v1(240,2005)
TMS: JTAG2.2 R6.1 U2.3 | length 2415.7
  Top Layer w10: JTAG2.2 166.82,520 R6.1 ; v1(230,2055) 284,2109 394.23,2109 443.98,2059.25 486.02,2059.25 530.77,2104 642.87,2104 669,2077.87 669,1989.74 683.45,1975.29 U2.3
  Bottom Layer w10: JTAG2.2 40,575 40,840 125,925 125,1733.28 150,1758.28 150,1859.95 151,1860.95 151,1961 230,2040 v1(230,2055)
TRST: JTAG2.4 R8.1 | length 108.3
  Top Layer w10: JTAG2.4 195.15,720 R8.1
TX1: P1.2 U1.14 | length 210.8
  Bottom Layer w20: P1.2 490,2760 558.73,2691.27 U1.14
USB_D+: R16.2 U2.29 | length 273.4
  Top Layer w10: U2.29 853.47,1424.66 950,1328.13 950,1242.07 R16.2
USB_D-: R14.2 U2.30 | length 336.9
  Top Layer w8: U2.30 873.15,1431.85 970,1335 970,1285 1010.61,1244.39 R14.2
VCC_3V3: C8.1 C9.1 C10.1 C11.1 C12.1 C13.1 C17.2 C18.2 C22.2 DS1.1 DS2.1 DS3.1 DS4.1 H2.1 H4.1 H6.1 JTAG2.5 L2.1 MOS1.2 R4.2 R5.2 R6.2 R10.1 R12.1 R21.1 R22.2 R23.2 R25.2 R26.2 U2.28 U2.42 U2.54 U2.71 U2.84 U2.96 U4.3 U5.7 | length 11936
  Top Layer w8: 65,2330 165.09,2330 R25.2 ; R12.1@714.09,1395.91 714.09,1404.09 765,1455 765,1495 782.33,1512.33 845,1512.33 ; C9.1 860.91,1390.35 834.47,1416.8 834.47,1462.79 U2.28 833.78,1501.11 845,1512.33 ; U2.96 873.15,2143.15 898.58,2168.58 C13.1 ; C10.1 1034.09,1359.09 v1(1065,1390) 1090,1390 1109.37,1409.37 U2.42 1111.15,1465.26 1111.15,1505.01 1160,1553.86 ; C8.1@1410,1603 1415,1603 1413.27,1601.27 U2.54 1288.73,1601.27 ; C12.1 U2.71 1343.81,1934.14 1184.14,1934.14 v1(1180,1930) 1180,1710 1288.73,1601.27 ; R10.1 1609.5,1777.46 1681.96,1705 H4.1@1740,1705 ; 845,1512.33 911.67,1579 1026.15,1579 1051.3,1553.86 1160,1553.86 ; 1160,1553.86 1207.42,1601.27 1288.73,1601.27
  Top Layer w10: C11.1 1109.37,2191.94 1109.37,2045.63 v1(1130,2025) ; v1(1310,1345) 1340,1315 MOS1.2
  Top Layer w20: 65,2330 50,2345 50,2525 H2.1 ; JTAG2.5 110,820 175,885 213.9,885 R4.2@239.49,859.41 ; R23.2 105,2560.09 H2.1 ; R6.2 315,589.91 315,783.9 R4.2@239.49,859.41 ; v1(385,2445) 250,2580 H2.1 ; C17.2 C18.2 ; v1(765,2375) 898.58,2241.42 C13.1 947.07,2185 1095.51,2185 C11.1 ; R5.2 780.06,2723.96 C18.2 ; v1(825,2630) 820,2625 820,2587.44 ; L2.1 860.44,2587.44 820,2587.44 ; R21.1 1120,548 1120,962.83 DS3.1 ; v1(1395,970) 1395,985 1341.52,1038.48 DS4.1 1268.05,970 1120,970 1051.52,1038.48 DS3.1 ; C12.1 1451.22,1920.6 R22.2 1609.5,1861.71 R10.1 ; H4.1 1995,1695 H6.1 ; v3(2727.5,2100) R26.2@2727.5,2139.94 ; U5.7 2757.5,1292.5 C22.2 ; R4.2@239.49,859.41 R4.2 289.27,867.74 DS1.1 535,963.48 678.48,963.48 752.17,1037.17 DS2.1 815.65,975 v1(930,975) 980.87,975 DS3.1 ; C18.2 820,2587.44
  Bottom Layer w10: v1(930,975) 930,1200 1049.25,1319.25 1049.25,1374.25 v1(1065,1390)
  Bottom Layer w20: v1(385,2445) 475,2355 745,2355 v1(765,2375) 819.25,2429.25 819.25,2624.25 v1(825,2630) ; v1(1130,2025) 1180,1975 v1(1180,1930) ; v1(1310,1345) 1310,1060 1550,820 U4.3 ; H4.1@1735,1715 1770.75,1679.25 1770.75,1663.27 1782.61,1651.4 1951.4,1651.4 2005,1705 2015,1705 2015,1750 2364.41,2099.41 2726.91,2099.41 v3(2727.5,2100) 2727.5,2077.5 2805,2000 2805,1310 2790,1295 U5.7
VCC_BLE: JTAG1.5 R1.2 R2.2 R5.1 U1.8 U1.9 | length 1433.6
  Top Layer w20: R5.1 930,2645 v1(975,2645) 992.96,2645 1085,2552.96 1085,2534.86 1159.86,2460 1475,2460 JTAG1.5 1605,2619.49 1449.49,2775 1370,2775 1355,2760 R2.2
  Bottom Layer w20: v1(975,2645) 977.96,2647.96 U1.8 U1.9
pads on no net: B1.3 B2.3 BAT1. H1.1 H2.5 H2.6 U1.1 U1.2 U1.12 U1.13 U1.16 U1.17 U1.18 U1.19 U2.1 U2.2 U2.4 U2.7 U2.8 U2.9 U2.12 U2.13 U2.14 U2.19 U2.20 U2.32 U2.33 U2.34 U2.35 U2.36 U2.37 U2.38 U2.39 U2.40 U2.43 U2.44 U2.45 U2.46 U2.47 U2.48 U2.56 U2.57 U2.65 U2.66 U2.67 U2.69 U2.70 U2.73 U2.77 U2.78 U2.79 U2.80 U2.81 U2.82 U2.85 U2.86 U2.87 U2.88 U2.89 U2.90 U2.91 U2.92 U2.93 U2.94 U2.95 U2.100 USB1.4 USB1.MH1 USB1.MH2 Y1. Y2.0

## Keep-outs
Keep-Out Layer:
  lines w0.5: 1791,2065.35 1791,1765 1911.6,1765 1911.6,2065.35 cw(c2108.45,2065.35) 2108.45,2262.2 2895.85,2262.2 cw(c2895.85,2065.35) 3092.7,2065.35 3092.7,884.25 cw(c2895.85,884.25) 2895.85,687.4 2108.45,687.4 cw(c2108.45,884.25) 1911.6,884.25 1912.54,1160 1791.46,1160 1791.46,884.25 1791.46,226.65 cw(c1594.61,226.65) 1594.61,29.8 216.65,29.8 cw(c216.65,226.65) 19.8,226.65 19.8,2785.71 cw(c216.65,2785.71) 216.65,2982.56 1594.61,2982.56 cw(c1594.61,2785.71) 1791.46,2785.71 1791.46,2065.35 ; 83373.36,184202.06 ccw(c83570.21,184202.06) 83570.21,184005.21 85145.01,184005.21 ccw(c85145.01,184202.06) 85341.86,184202.06 85341.86,185776.87 ccw(c85145.01,185776.87) 85145.01,185973.72 83570.21,185973.72 ccw(c83570.21,185776.87) 83373.36,185776.87 83373.36,184202.06
  lines w10: 2325.67,897.01 2325.67,2005 2680,2005 2680,897.01 2325.67,897.01

## Silkscreen, mask and mechanical layers (free items; w line width, h text height)
Top Overlay:
  lines w10: 40,1120 40,1160 150,1160 150,915 40,915 40,1150 ; 170,2695 170,2720 305,2720 305,2560 170,2560 170,2710 ; 570,2867.5 847.5,2867.5 850,2865 ; 570,2910 570,2935 850,2935 850,2795 570,2795 570,2805 570,2930 ; 710,2795 710,2935 ; 1375,2410 1375,2440 1505,2440 1505,2430 1505,2080 1375,2080 1375,2430 ; 1725,1770 1725,1845 1645,1925 1645,2040 1530,2155 ; 1530,2155 1555,2155 1530,2130 1530,2155 ; 540,2560 540,2725 665,2725 675,2725 675,2560 540,2560
  text "L_R0" at 585,2885 h30
  text "B_R0" at 725,2885 h30
  text "L_T0" at 585,2820 h30
  text "B_T1" at 725,2820 h30
  text "L_T1" at 195,2670 h30
  text "L_R1" at 550,2670 h30
  text "B_R0" at 185,2580 h30
  text "B_T0" at 550,2580 h30
  text "GND" at 1165,2475 h30
  text "TMS" at 1267.5,2475 h30
  text "TCK" at 1370,2475 h30
  text "RST" at 1472.5,2475 h30
  text "3V3" at 1575,2475 h30
  text "3V3" at 1390,2390 h30
  text "ON" at 1565,2370 h30
  text "SRST" at 1390,2340.83 h30
  text "SCK" at 1390,2291.67 h30
  text "OFF" at 1560,2265 h30
  text "MISO" at 1390,2242.5 h30
  text "MOSI" at 1390,2193.33 h30
  text "CS" at 1390,2144.17 h30
  text "GND" at 1390,2095 h30
  text "3V3" at 2070,1690 h30
  text "S_RST" at 2070,1595.71 h30
  text "S_SCK" at 2070,1496.43 h30
  text "S_MISO" at 2070,1397.14 h30
  text "S_MOSI" at 2070,1297.86 h30
  text "S_CS" at 2070,1198.57 h30
  text "3V3" at 55,1115 h30
  text "S_LED" at 2070,1099.28 h30
  text "RST" at 55,1070 h30
  text "TCK" at 55,1025 h30
  text "GND" at 2070,995 h30
  text "TMS" at 55,980 h30
  text "GND" at 55,935 h30
  text "Fly_Mouse_Send_2017_4_14" at 90,280 h30
Mechanical 2:
  circle w0.25: c-118.09,-280.2 r0.12
  circle w0.25: c1870.16,3054.41 r0.12
  circle w0.25: c2067.01,2857.56 r0.12
  circle w0.25: c-295.2,2857.56 r0.12